# Altium PCB AMP_MAIN_REV1.0.PcbDoc
Units mm, origin at the board's own origin, x right, y up, seen from the top; angles counter-clockwise.
Board outline 111.1 x 86.1 mm, 2 copper layers (Top Layer, Bottom Layer); 32 components, 25 nets, 102 pads, 2 vias.
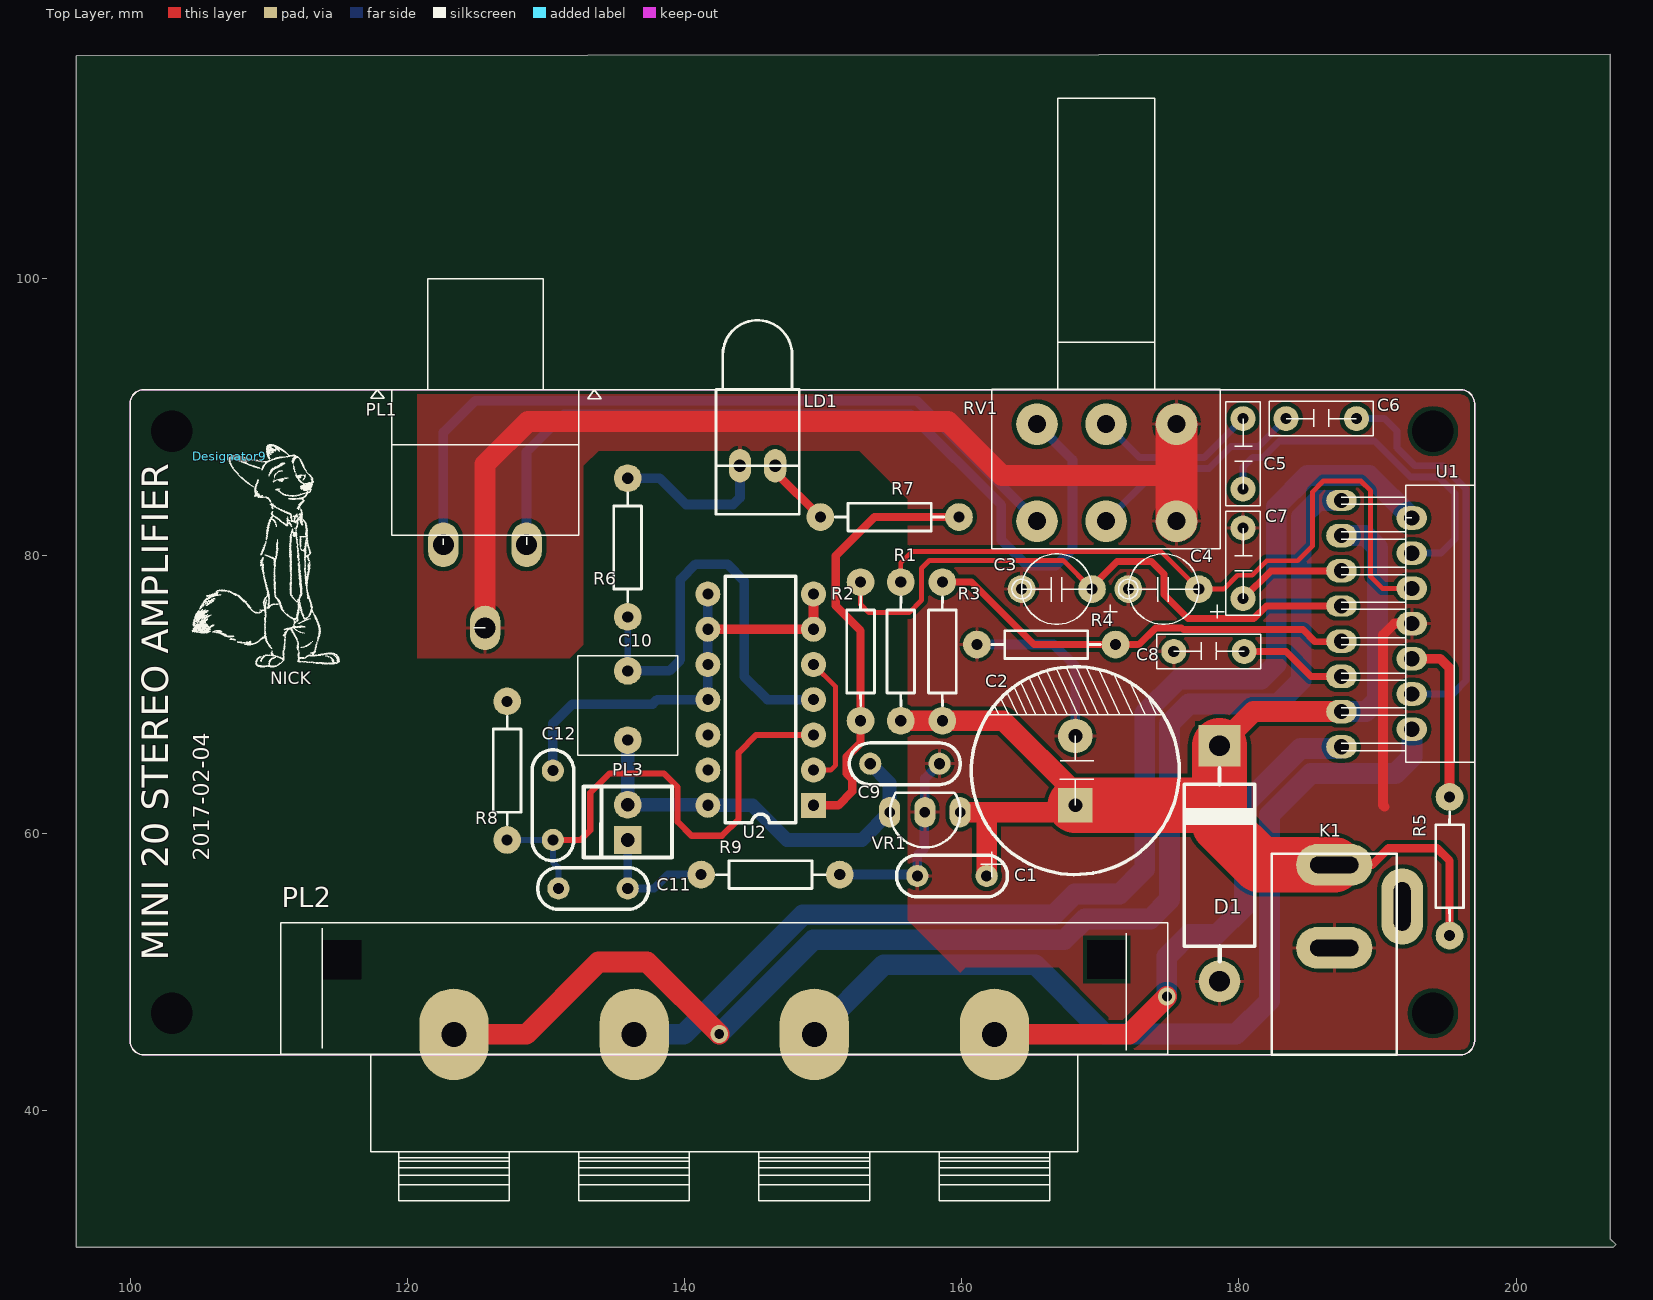
[diagram p0: Top Layer view]
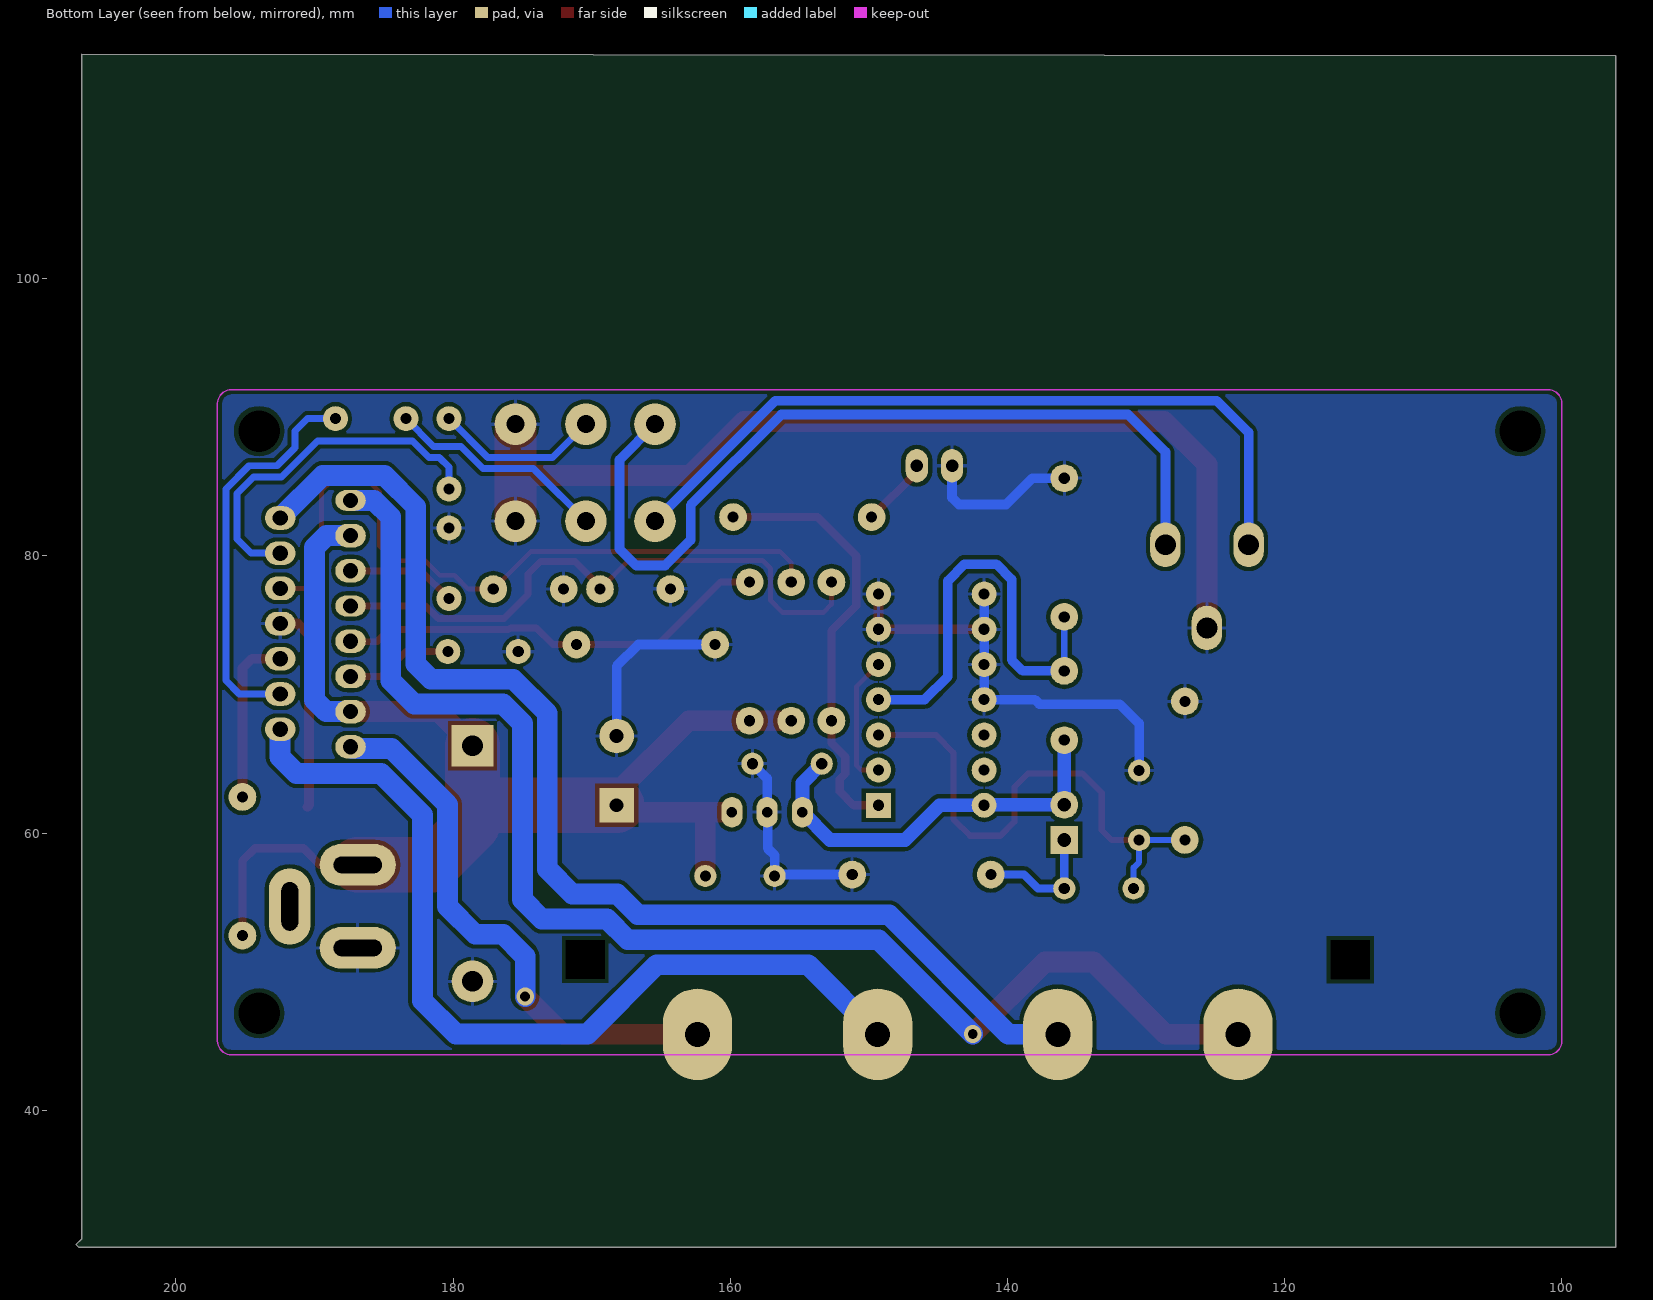
[diagram p1: Bottom Layer view, seen from below]

## Layer stack, top to bottom
Top Layer: signal copper 0.0356
Dielectric: dielectric 0.32, FR-4, Dk 4.8
Bottom Layer: signal copper 0.0356

## Board outline
96.1,116.1 96.1,30.1 207,30.1 207.2,30.3 206.8,30.7 206.8,116.2

## Design rules (kind name [scope] priority, off if disabled: settings)
Clearance [All] p1: gap=0.3
ComponentClearance [All] p1: gap=0.1 collisioncheckmode=3 verticalgap=0.1 showdistances=FALSE
PolygonConnect [All] p1: connectstyle=Relief reliefconductorwidth=0.254 reliefentries=4 polygonreliefangle="90 Angle" airgapwidth=0.254
RoutingVias [All] p1: holewidth=0.711 width=1.27 viastyle="Through Hole" minholewidth=0.711 minwidth=1.27 maxholewidth=0.711 maxwidth=1.27
SolderMaskExpansion [All] p1: expansion=0.102
Width [All] p1: maxlimit=10 minlimit=0.254 preferedwidth=0.5
27 further rules are at their usual default settings.

## Components (designator, comment, footprint, x,y, rotation, side; value= is the part's Value field where it differs from the comment)
C1 "100n" CAP200 156.8,56.9 r0 top
C2 "2200u 25V" "CAP RADIAL 13/26" 168.2,62 r90 top
C3 "1u 50V" "CAP PF 5.08/6.5" 169.4,77.6 r180 top
C4 "1u 50V" "CAP PF 5.08/6.5" 177.1,77.6 r180 top
C5 "220n" "CAP POLY 5.08/7.5/2.5" 180.3,89.9 r270 top
C6 "220n" "CAP POLY 5.08/7.5/2.5" 183.4,89.9 r0 top
C7 "220n" "CAP POLY 5.08/7.5/2.5" 180.3,82 r270 top
C8 "220n" "CAP POLY 5.08/7.5/2.5" 175.3,73.1 r0 top
C9 "100n" CAP200 153.4,65 r0 top
C10 "1u 63V" "WIMA MKS 2" 135.9,66.7 r90 top
C11 "100n" CAP200 135.9,56 r180 top
C12 "100p" CAP200 130.5,59.5 r90 top
D1 "1N5408" "DIODE 1N5408" 178.6,49.3 r90 top
Designator9 "Comment" DOODLE_NICK_WILDE 107.2,87.2 r0 top
K1 "DC JACK" "DC JACK" 187.462,55.973 r0 top
LD1 "TIL209" LED_RA_5MM 144,86.5 r270 top
PL1 "RCA 90 DEGREE STEREO" RCA_STEREO_PCB_VERTICAL 128.6,80.8 r180 top
PL2 "CON4" SPEAKER_TERMINAL_PCB 123.362,45.473 r0 top
PL3 "6410-02" "CON MOLEX 6410 2 WAY" 135.9,59.5 r90 top
R1 "10k" "RES 1/4W H" 155.6,78.1 r270 top
R2 "10k" "RES 1/4W H" 152.7,78.1 r270 top
R3 "470k" "RES 1/4W H" 158.6,78.1 r270 top
R4 "470k" "RES 1/4W H" 161.1,73.6 r0 top
R5 "22k" "RES 1/4W H" 195.2,62.6 r270 top
R6 "10k" "RES 1/4W H" 135.9,85.6 r270 top
R7 "220R" "RES 1/4W H" 149.8,82.8 r0 top
R8 "10k" "RES 1/4W H" 127.2,69.5 r270 top
R9 "10k" "RES 1/4W H" 151.2,57 r180 top
RV1 "B503K" "ALPS 043R" 175.5,89.5 r180 top
U1 "TDA7376B" MULTIWATT15V 187.4,84 r270 top
U2 "4013" "DIP 14" 149.3,62 r180 top
VR1 "78L05" TO92_REGULATOR 154.8,61.5 r0 top

## Footprints (in the part's own frame and the unit in brackets; to place one, negate y for a bottom-side part, rotate by r counter-clockwise, add the part's x,y. Pads: shape width x height; smd on the part's side, far side on the other; paste and mask are expansions set on the pad)
"ALPS 043R" [mm] "ALPS GANGED POTENTIOMETER"
  round 3 hole 1.3: 1(0,0) 2(5.08,0) 3(10.07,0) 4(0,7) 5(5.08,7) 6(10.07,7)
  silkscreen extent -3.16,-23.53 13.32,8.99
CAP200 [mm]
  round 1.6 hole 0.8: 1(0,0) 2(5,0)
  silkscreen extent -1.5,-1.5 6.5,1.5
"CAP PF 5.08/6.5" [mm] "RADIAL ELECTROLYTIC WITH PREFORMED LEADS"
  round 2 hole 0.8: 1(0,0) 2(5.08,0)
  silkscreen extent -1.84,-2.54 5.78,2.54
"CAP POLY 5.08/7.5/2.5" [mm] "POLYESTER CAPACITORS 5.08mm PIN SPACING, 2.5mm thick"
  round 1.8 hole 0.8: 1(0,0) 2(5.08,0)
  silkscreen extent -1.21,-1.25 6.29,1.25
"CAP RADIAL 13/26" [mm]
  rect 2.5x2.5 hole 1: 1(0,0)
  round 2.5 hole 1: 2(5,0)
  silkscreen extent -5.18,-7.5 10.04,7.5
"CON MOLEX 6410 2 WAY" [mm]
  rect 2x2 hole 1: 1(0,0)
  round 2 hole 1: 2(2.54,0)
  silkscreen extent -1.27,-3.2 3.85,3.18
"DC JACK" [mm]
  oval 5.5x3 hole 1.2 slot 3.5 at 0 deg: 1(-0.58,-4.26) 2(-0.58,1.73)
  oval 3x5.5 hole 1.2 slot 3.5 at 90 deg: 3(4.32,-1.27)
  silkscreen extent -5.08,-11.96 3.92,2.54
"DIODE 1N5408" [mm]
  round 3 hole 1.5: 1(0,0)
  rect 3x3 hole 1.5: 2(17,0)
  silkscreen extent 1.44,-2.54 15.38,2.54
"DIP 14" [mm]
  rect 1.8x1.8 hole 0.8: 1(0,0)
  round 1.8 hole 0.8: 2(0,-2.54) 3(0,-5.08) 4(0,-7.62) 5(0,-10.16) 6(0,-12.7) 7(0,-15.24) 8(7.62,-15.24) 9(7.62,-12.7) 10(7.62,-10.16) 11(7.62,-7.62) 12(7.62,-5.08) 13(7.62,-2.54) 14(7.62,0)
  silkscreen extent 1.27,-16.51 6.35,1.27
DOODLE_NICK_WILDE [mm] "Let's have some fun"
  silkscreen extent -2.71,-15.22 7.89,0.85
LED_RA_5MM [mm]
  oval 2.4x1.6 hole 0.9: A(0,2.54) K(0,0)
  silkscreen extent -10.5,-1.73 3.5,4.27
MULTIWATT15V [mm]
  oval 1.5x2.2 hole 1.1: 1(0,0) 7(7.62,0)
  oval 1.7x2.2 hole 1.1: 2(1.27,5.08) 3(2.54,0) 4(3.81,5.08) 5(5.08,0) 6(6.35,5.08) 8(8.89,5.08) 9(10.16,0) 10(11.43,5.08) 11(12.7,0) 12(13.97,5.08) 13(15.24,0) 14(16.51,5.08) 15(17.78,0)
  silkscreen extent -1.11,0 18.89,9.63
RCA_STEREO_PCB_VERTICAL [mm] "VERTICAL 2 X RCA SOCKET"
  oval 2.2x3.2 hole 1.5: 1(0,0) 2(2.99,6) 3(6,0)
  silkscreen extent -5.61,-19.2 11.84,6
"RES 1/4W H" [mm]
  round 2 hole 0.8: 1(0,0) 2(10,0)
  silkscreen extent 1.07,-1 8.91,1
SPEAKER_TERMINAL_PCB [mm] "QUICK-RELEASE SPEAKER TERMINALS"
  round 1.6 hole 2.8 square: 0(-8.09,5.38) 0(47.1,5.4)
  oval 5x6.6 hole 1.8: 1(0,0) 2(13,0) 3(26,0) 4(39,0)
  silkscreen extent -12.48,-12.01 51.49,8.05
TO92_REGULATOR [mil] "FOOTPRINT FOR TO-92 VOLTAGE REGULATORS"
  oval 60x86.61 hole 30: 1(0,0) 2(100,0) 3(200,0)
  silkscreen extent 1,-100 201,55
"WIMA MKS 2" [mm]
  round 2 hole 0.8: 1(0,0) 2(5,0)
  silkscreen extent -1.1,-3.6 6.1,3.6

## Part data
C1 C5 C6 C7 C8 C9 C10 C11 C12: library part CAPACITOR
C2 C3 C4: library part POL_CAP
D1: library part STD_DIODE
LD1: library part STD_LED
PL1: library part CON3, "3 Way Connector"
PL2: "4 Way Connector"
PL3: library part CON2, "2 Way connector"
R1 R2 R3 R4 R5 R6 R7 R8 R9: library part RES
RV1: library part "POT DUAL GANGED"
U1: library part TDA7376, "Stereo 35W Automotive Power Amplifier"
U2: "FLIP-FLOP"
VR1: library part "REG 78LXX", "Low power fixed voltage regulator"

## Free pads (board coordinates)
  round 1.6 hole 3: 0(103,47) 0(103,89) 0(194,47) 0(194,89)

## Via types
v1: diameter 1.27, hole 0.711, Top Layer to Bottom Layer, 2 vias

## Nets (pads, with @x,y where several pads share a name; then routed paths per layer and width w, separated by ;. In a path a pad name is that pad's centre, name@x,y a point inside that pad or via, vN(x,y) a via of type N, cw(c..) or ccw(c..) an arc to the next point about the centre after c; other vN are vias at no path point)
\S\T\B\Y\: R2.2 R7.2 U2.1 | length 31.6
  Top Layer w0.6: U2.1 151.1,62 152.1,63 152.1,63.9 151.7,64.3 151.7,65.5 152.7,66.5 R2.2 152.7,74.6 150.9,76.4 150.9,80 153.7,82.8 R7.2
B+: C1.2 C2.1 D1.2 K1.2 R1.2 R3.2 R5.2 U1.3 U1.13 VR1.3 | length 92.6
  Top Layer w0.6: K1.2 189.603,57.703 190.8,58.9 194.3,58.9 195.2,58 R5.2
  Top Layer w1.5: R1.2 R3.2 163,68.1 C2.1@168.2,62.9 ; VR1.3 C2.1@167.7,61.5 ; C1.2 161.8,61.4 ; D1.2 181.06,68.76 U1.13
  Top Layer w4: C2.1 177.2,62 ; D1.2 178.6,60.6 181.497,57.703 K1.2
  Bottom Layer w1.5: U1.13 189.16,68.76 190,69.6 190,80.6 189.14,81.46 U1.3
GND: C1.1 C2.2 C3.2 C4.2 C7.1 C8.1 C9.2 C12.2 D1.1 K1.1 LD1.K PL1.2 R4.1 R6.1 R8.1 R9.1 RV1.1 RV1.4 U1.8 U2.6 U2.7 U2.8 U2.9 U2.10 U2.11 VR1.2 | length 157.9
  Top Layer w0.7: U2.9 U2.6 U2.7 ; 190.5,61.9 190.4,62 190.4,74.3 191.21,75.11 U1.8
  Top Layer w1.5: PL1.2 125.61,86.61 128.7,89.7 159,89.7 162.9,85.8 175.4,85.8
  Top Layer w3: RV1.4 RV1.1
  Bottom Layer w0.7: C12.2 130.5,67.9 131.9,69.3 137.7,69.3 138.02,69.62 U2.11 U2.10 U2.9 U2.8 ; R6.1 138.2,85.6 140.1,83.7 143.5,83.7 144,84.2 LD1.K ; R9.1 C1.1@156.7,57 ; C1.1 156.8,58.4 157.3,58.9 157.3,61.46 VR1.2 157.34,63.94 C9.2 ; R4.1 166.64,73.6 168.2,72.04 C2.2
L: PL1.1 RV1.3 | length 63.8
  Bottom Layer w0.7: PL1.1 128.6,87.5 131.3,90.2 156.316,90.2 162.858,83.658 162.858,81.142 164.7,79.3 166.79,79.3 168,80.51 168,86.93 RV1.3
LCH: C5.2 U1.4 | length 26.1
  Bottom Layer w0.5: C5.2 180.3,86.4 181,87.1 181.731,87.1 182.931,88.3 189.769,88.3 192.369,85.7 194.4,85.7 195.6,84.5 195.6,81.2 194.59,80.19 U1.4
NetC3_1: C3.1 R2.1 U1.7 | length 44.2
  Top Layer w0.35: R2.1@152.704,78.096 152.704,76.5 153.304,75.9 156.2,75.9 157.1,76.8 157.1,79.1 157.675,79.675 167.325,79.675 C3.1
  Top Layer w0.5: C3.1 169.4,77.8 171.2,79.6 173.7,79.6 174.6,78.7 174.6,77.2 176.33,75.47 181.07,75.47 181.98,76.38 U1.7
NetC4_1: C4.1 R1.1 U1.6 | length 52.1
  Top Layer w0.35: R1.1 155.6,79.5 156.425,80.325 174.375,80.325 C4.1 178.9,77.6 179.9,78.6 180.955,78.6 182,79.645 184.245,79.645 185.3,80.7 185.3,84.6 186.1,85.4 188.8,85.4 189.5,84.7 189.5,78.5 190.35,77.65 U1.6
NetC5_1: C5.1 RV1.2 | length 12
  Bottom Layer w0.5: RV1.2 172.82,87.1 177.5,87.1 C5.1
NetC6_1: C6.1 RV1.5 | length 16.1
  Bottom Layer w0.5: RV1.5 174,86.08 174,86.1 174.2,86.3 177.831,86.3 179.431,87.9 181.4,87.9 C6.1
NetC7_2: C7.2 U1.5 | length 7.9
  Top Layer w0.5: C7.2 182.3,78.92 U1.5
NetC8_2: C8.2 U1.11 | length 8.3
  Top Layer w0.5: C8.2@179.88,73.1 183.4,73.1 185.2,71.3 U1.11
NetC9_1: C9.1 C10.1 PL3.2 U2.14 VR1.1 | length 29.5
  Bottom Layer w1: C10.1 PL3.2 U2.14@141.64,62.04 ; U2.14 144.9,62 147.4,59.5 152.8,59.5 VR1.1 154.8,63.6 C9.1
NetC10_2: C10.2 R6.2 U2.4 | length 32
  Bottom Layer w0.45: C10.2 R6.2
  Bottom Layer w0.7: C10.2 138.9,71.7 139.7,72.5 139.7,78.3 140.8,79.4 143.1,79.4 144.3,78.2 144.3,71.3 145.98,69.62 U2.4
NetC11_1: C11.1 PL3.1 R9.2 | length 9.2
  Bottom Layer w0.6: PL3.1 C11.1 137.8,56 138.8,57 R9.2
NetC11_2: C11.2 C12.1 R8.2 U2.3 | length 38.5
  Top Layer w0.45: C12.1 132.5,59.5 133.2,60.2 133.2,62.9 134.6,64.3 138.5,64.3 139.5,63.3 139.5,60.8 140.5,59.8 142.7,59.8 143.9,61 143.9,65.8 145.18,67.08 U2.3
  Bottom Layer w0.45: R8.2 C12.1 130.5,57.903 130.9,57.503 C11.2
NetLD1_A: LD1.A R7.1 | length 5.1
  Top Layer w0.6: LD1.A 146.54,86.06 R7.1
NetPL2_1: PL2.1 U1.1 | length 99.3
  Top Layer w0.5: U1.1@186.93,83.53 U1.1
  Top Layer w1.5: PL2.1 128.573,45.473 133.8,50.7 137.3,50.7 v1(142.5,45.5)
  Bottom Layer w1.5: v1(142.5,45.5) 149.3,52.3 167.4,52.3 168.9,53.8 173.6,53.8 175,55.2 175,67.9 176.4,69.3 182.8,69.3 184.5,71 184.5,82.8 185.7,84 U1.1
NetPL2_2: PL2.2 U1.2 | length 87.3
  Bottom Layer w1.5: PL2.2 139.927,45.473 148.554,54.1 166.654,54.1 168.154,55.6 171.4,55.6 173.2,57.4 173.2,68.646 175.654,71.1 181.6,71.1 182.7,72.2 182.7,83.546 184.954,85.8 189.41,85.8 U1.2
NetPL2_3: PL2.3 U1.14 | length 65.4
  Bottom Layer w1.5: PL2.3 154.389,50.5 165.3,50.5 170.3,45.5 179.8,45.5 182.2,47.9 182.2,61.3 185.2,64.3 191.3,64.3 192.48,65.48 U1.14
NetPL2_4: PL2.4 U1.15 | length 39.6
  Top Layer w1.5: PL2.4 172.073,45.473 v1(174.8,48.2)
  Bottom Layer w1.5: v1(174.8,48.2) 174.8,51.1 176.4,52.7 178.4,52.7 180.4,54.7 180.4,62.046 184.454,66.1 187.28,66.1 U1.15
NetR3_1: R3.1 R4.2 U1.9 | length 31.6
  Top Layer w0.5: R3.1 160.7,78.1 165.2,73.6 R4.2 172.8,73.6 174,74.8 175.869,74.8 175.999,74.67 184.63,74.67 185.5,73.8 187.36,73.8 U1.9
NetR5_1: R5.1 U1.10 | length 12.3
  Top Layer w0.7: U1.10 194.53,72.57 195.2,71.9 R5.1
NetU2_2: U2.2 U2.5 | length 9.7
  Top Layer w0.35: U2.2 150.54,64.54 150.9,64.9 150.9,70.56 U2.5
R: PL1.3 RV1.6 | length 55.5
  Bottom Layer w0.7: PL1.3 122.6,88.9 124.9,91.2 156.73,91.2 RV1.6
RCH: C6.2 U1.12 | length 28.9
  Bottom Layer w0.5: C6.2 190.5,89.9 191.4,89 191.4,87.8 192.7,86.5 194.731,86.5 196.4,84.831 196.4,71 195.43,70.03 U1.12
pads on no net: K1.3 PL2.0 U2.12 U2.13

## Polygon pours and split planes (outlines as drawn)
GND on Top Layer "Top Layer-No Net" (solid, remove dead copper, pour order 2): 120.7,92.8 120.7,72.6 131.7,72.6 132.7,73.6 132.7,86.4 132.7,86.5 133.8,87.6 152.6,87.6 155.1,85.1 156.1,84.1 156.1,54.2 156.1,53.7 159.9,49.9 160.3,50.3 165.3,50.3 167,50.3 170,47.3 170.6,46.7 170.6,42.7 198.8,42.7 199,42.5 198.3,43.2 198.3,93.1 121.3,93.1 121.2,93
GND on Bottom Layer "Top Layer-No Net" (solid, remove dead copper, pour order 4): 98,94.3 98.4,93.9 98.4,41.1 199.9,41.1 200.2,40.8 200.7,41.3 200.7,93.9

## Keep-outs
Keep-Out Layer:
  lines w0.1: 100,45 ccw(c101,45) 101,44 196,44 ccw(c196,45) 197,45 197,45.8 197,91 ccw(c196,91) 196,92 114.9,92 101,92 ccw(c101,91) 100,91 100,45

## Silkscreen, mask and mechanical layers (free items; w line width, h text height)
Top Overlay:
  lines w0.1: 100,45 ccw(c101,45) 101,44 196,44 ccw(c196,45) 197,45 197,91 ccw(c196,91) 196,92 101,92 ccw(c101,91) 100,91 100,45
  text "NICK" at 110.1,70.4 h1.52
  text "2017-02-04" at 106.1,58 h2 r90
  text "MINI 20 STEREO AMPLIFIER" at 103.4,50.8 h3.3 r90
Mechanical 1:
  lines w0.1: 166.235,43.946 166.235,41.4 119.789,41.4 119.789,44 115.089,44 102.241,44 101,44 cw(c101,45) 100,45 100,46.2 100,91 cw(c101,91) 101,92 178.63,92 ; 166.289,44 166.462,44 176.362,44 195,44 196,44 ccw(c196,45) 197,45 197,65 197,70 ; 169.6,92 196,92 cw(c196,91) 197,91 197,63.6